# Altium PCB Test.PcbDoc (part 2 of 9)
Units mm, origin at the board's own origin, x right, y up, seen from the top; angles counter-clockwise.
Board outline 152.4 x 101.6 mm, 2 copper layers (Top Layer, Bottom Layer); 1 components, 0 nets, 1713 pads, 1 vias.
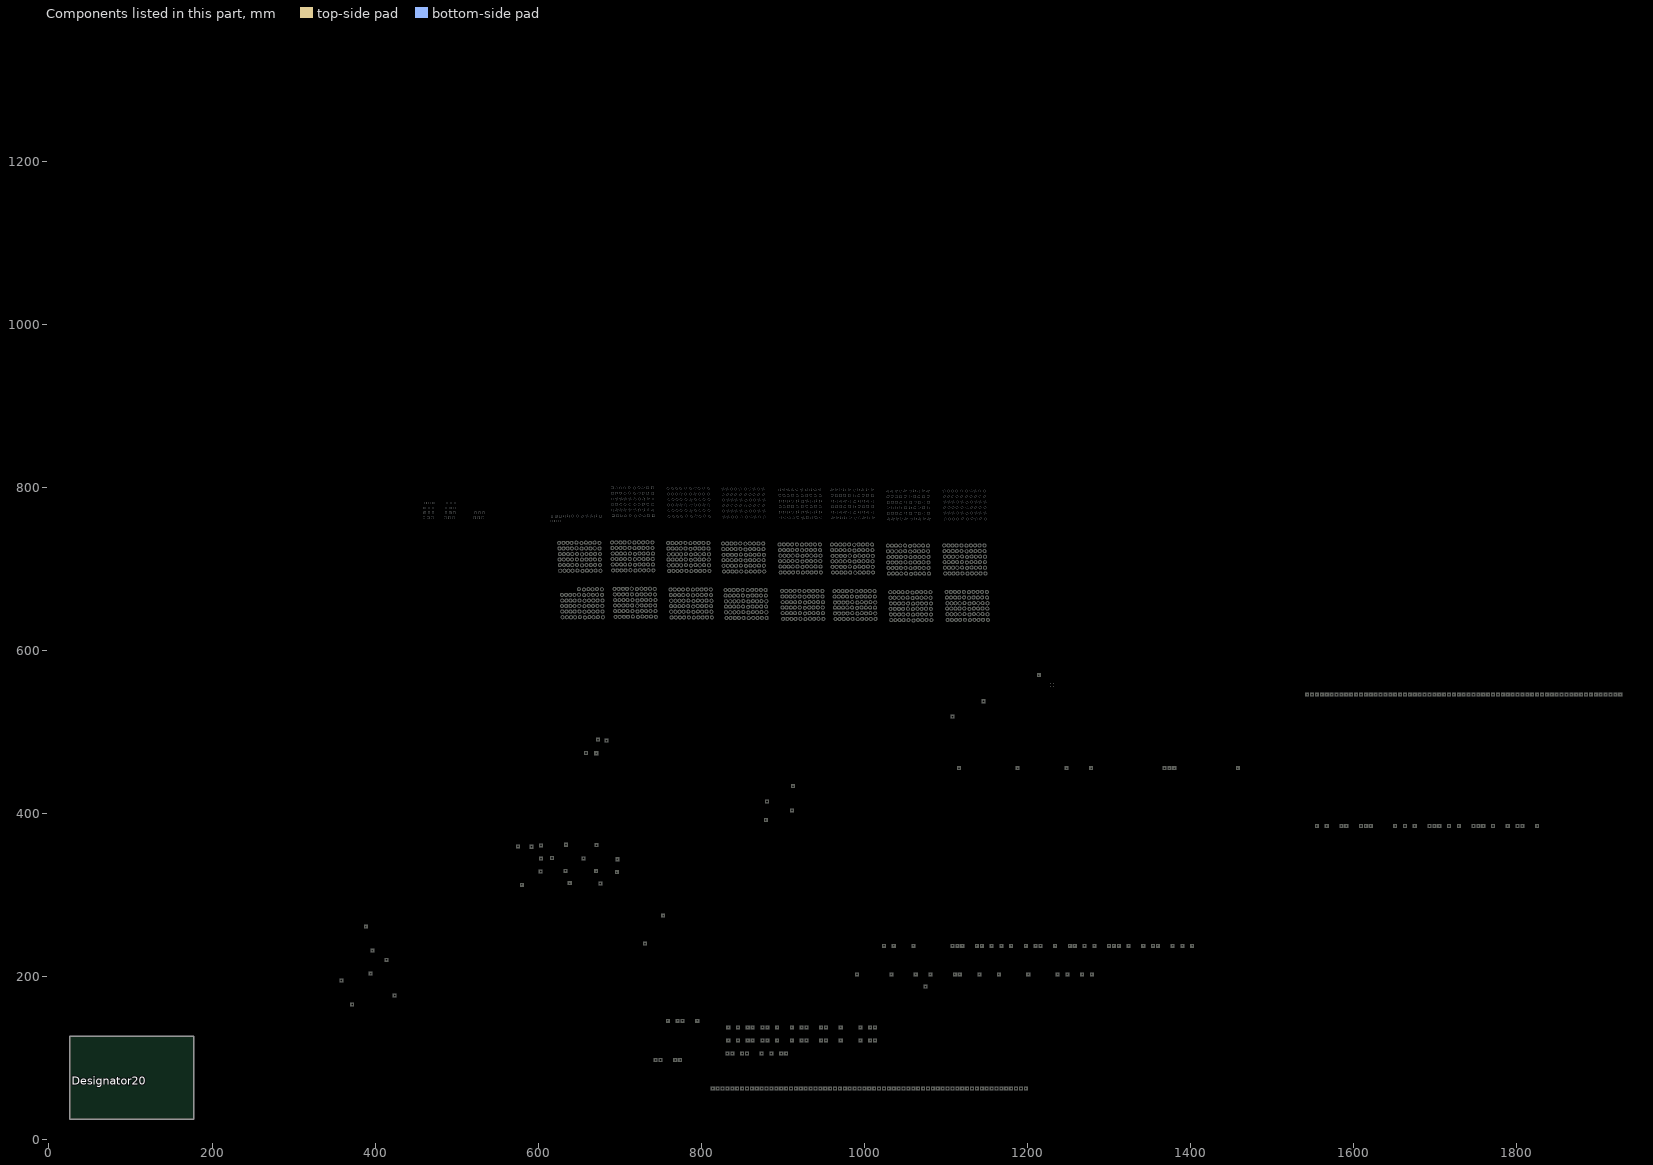
[diagram p2: the components of this part, seen from the top]

## Via types
v1: diameter 0.9, hole 0.4, Top Layer to Bottom Layer, 1 vias

## Nets (pads, with @x,y where several pads share a name; then routed paths per layer and width w, separated by ;. In a path a pad name is that pad's centre, name@x,y a point inside that pad or via, vN(x,y) a via of type N, cw(c..) or ccw(c..) an arc to the next point about the centre after c; other vN are vias at no path point) (continued)
copper on no net: (continued)
  Top Layer w0.2: 82.296,66.421 85.979,66.421 ; 83.185,69.088 88.265,69.088 ; 105.189,93.98 115.189,93.98 ; 115.189,83.98 115.189,93.98 ; 115.189,103.98 115.189,93.98 ; 125.189,93.98 115.189,93.98 ; 147.86,191.643 149.86,191.643 ; 149.86,189.643 149.86,191.643 ; 149.86,193.643 149.86,191.643 ; 151.86,191.643 149.86,191.643 ; 153.829,156.591 155.829,156.591 ; 155.829,154.591 155.829,156.591 ; 155.829,158.591 155.829,156.591 ; 155.861,175.133 157.861,175.133 ; 157.829,156.591 155.829,156.591 ; 157.861,173.133 157.861,175.133 ; 157.861,177.133 157.861,175.133 ; 159.861,175.133 157.861,175.133 ; 167.545,153.162 169.545,153.162 ; 168.688,186.182 170.688,186.182 ; 169.545,151.162 169.545,153.162 ; 169.545,155.162 169.545,153.162 ; 170.688,184.182 170.688,186.182 ; 170.688,188.182 170.688,186.182 ; 171.101,173.101 173.101,173.101 ; 171.545,153.162 169.545,153.162 ; 172.688,186.182 170.688,186.182 ; 173.101,171.101 173.101,173.101 ; 173.101,175.101 173.101,173.101 ; 175.101,173.101 173.101,173.101 ; 181.134,182.118 183.134,182.118 ; 181.388,144.653 183.388,144.653 ; 181.515,164.211 183.515,164.211 ; 183.134,180.118 183.134,182.118 ; 183.134,184.118 183.134,182.118 ; 183.388,142.653 183.388,144.653 ; 183.388,146.653 183.388,144.653 ; 183.515,162.211 183.515,164.211 ; 183.515,166.211 183.515,164.211 ; 185.134,182.118 183.134,182.118 ; 185.388,144.653 183.388,144.653 ; 185.515,164.211 183.515,164.211 ; 189.136,78.613 199.136,78.613 ; 191.548,160.655 193.548,160.655 ; 193.326,144.018 195.326,144.018 ; 193.548,158.655 193.548,160.655 ; 193.548,162.655 193.548,160.655 ; 194.342,175.895 196.342,175.895 ; 195.326,142.018 195.326,144.018 ; 195.326,146.018 195.326,144.018 ; 195.548,160.655 193.548,160.655 ; 196.342,173.895 196.342,175.895 ; 196.342,177.895 196.342,175.895 ; 197.326,144.018 195.326,144.018 ; 198.342,175.895 196.342,175.895 ; 199.136,68.613 199.136,78.613 ; 199.136,88.613 199.136,78.613 ; 201.962,156.464 203.962,156.464 ; 203.867,144.145 205.867,144.145 ; 203.867,172.593 205.867,172.593 ; 203.962,154.464 203.962,156.464 ; 203.962,158.464 203.962,156.464 ; 205.867,142.145 205.867,144.145 ; 205.867,146.145 205.867,144.145 ; 205.867,170.593 205.867,172.593 ; 205.867,174.593 205.867,172.593 ; 205.962,156.464 203.962,156.464 ; 207.867,144.145 205.867,144.145 ; 207.867,172.593 205.867,172.593 ; 209.136,78.613 199.136,78.613 ; 229.522,89.789 239.522,89.789 ; 230.665,58.801 198.12,59.182 ; 239.522,79.789 239.522,89.789 ; 239.522,99.789 239.522,89.789 ; 240.665,48.801 198.12,59.182 ; 240.665,68.801 198.12,59.182 ; 249.522,89.789 239.522,89.789 ; 250.665,58.801 198.12,59.182 ; 259.24,116.332 270.891,76.581 ; 269.24,106.332 270.891,76.581 ; 269.24,126.332 270.891,76.581 ; 276.385,63.754 286.385,63.754 ; 279.24,116.332 270.891,76.581 ; 280.575,230.124 282.575,230.124 ; 282.575,228.124 282.575,230.124 ; 282.575,232.124 282.575,230.124 ; 284.575,230.124 282.575,230.124 ; 286.385,53.754 286.385,63.754 ; 286.385,73.754 286.385,63.754 ; 296.385,63.754 286.385,63.754 ; 296.958,192.659 298.958,192.659 ; 298.958,190.659 298.958,192.659 ; 298.958,194.659 298.958,192.659 ; 300.958,192.659 298.958,192.659 ; 324.771,178.689 326.771,178.689 ; 326.771,176.689 326.771,178.689 ; 326.771,180.689 326.771,178.689 ; 328.771,178.689 326.771,178.689 ; 336.328,228.092 338.328,228.092 ; 338.328,226.092 338.328,228.092 ; 338.328,230.092 338.328,228.092 ; 339.884,199.009 341.884,199.009 ; 340.328,228.092 338.328,228.092 ; 341.884,197.009 341.884,199.009 ; 341.884,201.009 341.884,199.009 ; 343.884,199.009 341.884,199.009 ; 379.254,185.547 381.254,185.547 ; 381.254,183.547 381.254,185.547 ; 381.254,187.547 381.254,185.547 ; 383.254,185.547 381.254,185.547 ; 395.256,162.052 397.256,162.052 ; 397.256,160.052 397.256,162.052 ; 397.256,164.052 397.256,162.052 ; 399.256,162.052 397.256,162.052 ; 422.688,194.183 424.688,194.183 ; 424.688,192.183 424.688,194.183 ; 424.688,196.183 424.688,194.183 ; 426.688,194.183 424.688,194.183 ; 572.675,327.914 574.675,327.914 ; 573.183,343.662 575.183,343.662 ; 574.675,325.914 574.675,327.914 ; 574.675,329.914 574.675,327.914 ; 575.183,341.662 575.183,343.662 ; 575.183,345.662 575.183,343.662 ; 576.675,327.914 574.675,327.914 ; 577.183,343.662 575.183,343.662 ; 589.312,327.533 591.312,327.533 ; 589.82,343.281 591.82,343.281 ; 591.312,325.533 591.312,327.533 ; 591.312,329.533 591.312,327.533 ; 591.82,341.281 591.82,343.281 ; 591.82,345.281 591.82,343.281 ; 593.312,327.533 591.312,327.533 ; 593.82,343.281 591.82,343.281 ; 594.519,312.42 596.519,312.42 ; 596.519,310.42 596.519,312.42 ; 596.519,314.42 596.519,312.42 ; 598.519,312.42 596.519,312.42 ; 606.076,314.071 608.076,314.071 ; 608.076,312.071 608.076,314.071 ; 608.076,316.071 608.076,314.071 ; 610.076,314.071 608.076,314.071 ; 614.458,329.946 616.458,329.946 ; 614.966,361.95 616.966,361.95 ; 616.458,327.946 616.458,329.946 ; 616.458,331.946 616.458,329.946 ; 616.966,359.95 616.966,361.95 ; 616.966,363.95 616.966,361.95 ; 618.458,329.946 616.458,329.946 ; 618.966,361.95 616.966,361.95 ; 619.665,314.833 621.665,314.833 ; 621.665,312.833 621.665,314.833 ; 621.665,316.833 621.665,314.833 ; 623.665,314.833 621.665,314.833 ; 631.984,345.694 633.984,345.694 ; 633.984,343.694 633.984,345.694 ; 633.984,347.694 633.984,345.694 ; 635.984,345.694 633.984,345.694 ; 641.636,475.361 643.636,475.361 ; 643.636,473.361 643.636,475.361 ; 643.636,477.361 643.636,475.361 ; 643.795,491.998 645.795,491.998 ; 645.636,475.361 643.636,475.361 ; 645.795,489.998 645.795,491.998 ; 645.795,493.998 645.795,491.998 ; 647.795,491.998 645.795,491.998 ; 653.066,329.565 655.066,329.565 ; 653.574,361.569 655.574,361.569 ; 655.066,327.565 655.066,329.565 ; 655.066,331.565 655.066,329.565 ; 655.574,359.569 655.574,361.569 ; 655.574,363.569 655.574,361.569 ; 657.066,329.565 655.066,329.565 ; 657.574,361.569 655.574,361.569 ; 658.273,314.452 660.273,314.452 ; 658.781,491.109 660.781,491.109 ; 660.273,312.452 660.273,314.452 ; 660.273,316.452 660.273,314.452 ; 660.781,489.109 660.781,491.109 ; 660.781,493.109 660.781,491.109 ; 662.273,314.452 660.273,314.452 ; 662.781,491.109 660.781,491.109 ; 665.893,405.13 667.893,405.13 ; 667.893,403.13 667.893,405.13 ; 667.893,407.13 667.893,405.13 ; 669.449,345.313 671.449,345.313 ; 669.893,405.13 667.893,405.13 ; 671.449,343.313 671.449,345.313 ; 671.449,347.313 671.449,345.313 ; 673.449,345.313 671.449,345.313 ; 679.609,472.948 681.609,472.948 ; 681.609,470.948 681.609,472.948 ; 681.609,474.948 681.609,472.948 ; 683.609,472.948 681.609,472.948 ; 684.435,402.717 686.435,402.717 ; 686.435,400.717 686.435,402.717 ; 686.435,404.717 686.435,402.717 ; 688.435,402.717 686.435,402.717 ; 694.341,404.495 696.341,404.495 ; 694.976,360.426 696.976,360.426 ; 696.341,402.495 696.341,404.495 ; 696.341,406.495 696.341,404.495 ; 696.5,421.132 698.5,421.132 ; 696.976,358.426 696.976,360.426 ; 696.976,362.426 696.976,360.426 ; 698.341,404.495 696.341,404.495 ; 698.5,419.132 698.5,421.132 ; 698.5,423.132 698.5,421.132 ; 698.532,243.586 700.532,243.586 ; 698.976,360.426 696.976,360.426 ; 699.04,275.59 701.04,275.59 ; 699.675,313.309 701.675,313.309 ; 700.5,421.132 698.5,421.132 ; 700.532,241.586 700.532,243.586 ; 700.532,245.586 700.532,243.586 ; 701.04,273.59 701.04,275.59 ; 701.04,277.59 701.04,275.59 ; 701.675,311.309 701.675,313.309 ; 701.675,315.309 701.675,313.309 ; 702.532,243.586 700.532,243.586 ; 703.04,275.59 701.04,275.59 ; 703.675,313.309 701.675,313.309 ; 703.739,228.473 705.739,228.473 ; 705.739,226.473 705.739,228.473 ; 705.739,230.473 705.739,228.473 ; 707.168,403.86 709.168,403.86 ; 707.739,228.473 705.739,228.473 ; 709.168,401.86 709.168,403.86 ; 709.168,405.86 709.168,403.86 ; 711.168,403.86 709.168,403.86 ; 729.393,256.413 731.393,256.413 ; 731.393,254.413 731.393,256.413 ; 731.393,258.413 731.393,256.413 ; 733.393,256.413 731.393,256.413 ; 734.092,225.552 736.092,225.552 ; 736.092,223.552 736.092,225.552 ; 736.092,227.552 736.092,225.552 ; 738.092,225.552 736.092,225.552 ; 751,146 753,146 ; 751,184 753,184 ; 753,144 753,146 ; 753,148 753,146 ; 753,182 753,184 ; 753,186 753,184 ; 755,146 753,146 ; 755,184 753,184 ; 757,184 759,184 ; 759,182 759,184 ; 759,186 759,184 ; 761,184 759,184 ; 763,146 765,146 ; 763,184 765,184 ; 765,144 765,146 ; 765,148 765,146 ; 765,182 765,184 ; 765,186 765,184 ; 767,146 765,146 ; 767,184 765,184 ; 769,184 771,184 ; 771,182 771,184 ; 771,186 771,184 ; 773,184 771,184 ; 775,184 777,184 ; 777,182 777,184 ; 777,186 777,184 ; 779,184 777,184 ; 781,146 783,146 ; 781,184 783,184 ; 783,144 783,146 ; 783,148 783,146 ; 783,182 783,184 ; 783,186 783,184 ; 785,146 783,146 ; 785,184 783,184 ; 787,146 789,146 ; 787,184 789,184 ; 789,144 789,146 ; 789,148 789,146 ; 789,182 789,184 ; 789,186 789,184 ; 791,146 789,146 ; 791,184 789,184 ; 793,184 795,184 ; 795,182 795,184 ; 795,186 795,184 ; 797,184 795,184 ; 798.354,403.733 800.354,403.733 ; 799,146 801,146 ; 799,184 801,184 ; 800.354,401.733 800.354,403.733 ; 800.354,405.733 800.354,403.733 ; 801,144 801,146 ; 801,148 801,146 ; 801,182 801,184 ; 801,186 801,184 ; 802.354,403.733 800.354,403.733 ; 803,146 801,146 ; 803,184 801,184 ; 818,106 820,106 ; 819,122 821,122 ; 819,138 821,138 ; 820,104 820,106 ; 820,108 820,106 ; 821,120 821,122 ; 821,124 821,122 ; 821,136 821,138 ; 821,140 821,138 ; 822,106 820,106 ; 823,122 821,122 ; 823,138 821,138 ; 824,106 826,106 ; 825,122 827,122 ; 825,138 827,138 ; 826,104 826,106 ; 826,108 826,106 ; 827,120 827,122 ; 827,124 827,122 ; 827,136 827,138 ; 827,140 827,138 ; 828,106 826,106 ; 829,122 827,122 ; 829,138 827,138 ; 837,122 839,122 ; 837,138 839,138 ; 839,120 839,122 ; 839,124 839,122 ; 839,136 839,138 ; 839,140 839,138 ; 839.629,394.462 841.629,394.462 ; 841,122 839,122 ; 841,138 839,138 ; 841.629,392.462 841.629,394.462 ; 841.629,396.462 841.629,394.462 ; 842,106 844,106 ; 843.058,433.832 845.058,433.832 ; 843.629,394.462 841.629,394.462 ; 844,104 844,106 ; 844,108 844,106 ; 845.058,431.832 845.058,433.832 ; 845.058,435.832 845.058,433.832 ; 846,106 844,106 ; 847.058,433.832 845.058,433.832 ; 849,122 851,122 ; 849,138 851,138 ; 851,120 851,122 ; 851,124 851,122 ; 851,136 851,138 ; 851,140 851,138 ; 853,122 851,122 ; 853,138 851,138 ; 860,106 862,106 ; 862,104 862,106 ; 862,108 862,106 ; 864,106 862,106 ; 866,106 868,106 ; 867,122 869,122 ; 867,138 869,138 ; 868,104 868,106 ; 868,108 868,106 ; 869,120 869,122 ; 869,124 869,122 ; 869,136 869,138 ; 869,140 869,138 ; 870,106 868,106 ; 871,122 869,122 ; 871,138 869,138 ; 876.586,235.204 878.586,235.204 ; 878,106 880,106 ; 878.491,234.315 880.491,234.315 ; 878.586,233.204 878.586,235.204 ; 878.586,237.204 878.586,235.204 ; 878.745,251.841 880.745,251.841 ; 879.38,401.955 881.38,401.955 ; 880,104 880,106 ; 880,108 880,106 ; 880.491,232.315 880.491,234.315 ; 880.491,236.315 880.491,234.315 ; 880.586,235.204 878.586,235.204 ; 880.65,250.952 882.65,250.952 ; 880.65,431.673 882.65,431.673 ; 880.745,249.841 880.745,251.841 ; 880.745,253.841 880.745,251.841 ; 881.38,399.955 881.38,401.955 ; 881.38,403.955 881.38,401.955 ; 882,106 880,106 ; 882.491,234.315 880.491,234.315 ; 882.65,248.952 882.65,250.952 ; 882.65,252.952 882.65,250.952 ; 882.65,429.673 882.65,431.673 ; 882.65,433.673 882.65,431.673 ; 882.745,251.841 880.745,251.841 ; 883.38,401.955 881.38,401.955 ; 884.65,250.952 882.65,250.952 ; 884.65,431.673 882.65,431.673 ; 885,122 887,122 ; 885,138 887,138 ; 887,120 887,122 ; 887,124 887,122 ; 887,136 887,138 ; 887,140 887,138 ; 889,122 887,122 ; 889,138 887,138 ; 890,106 892,106 ; 892,104 892,106 ; 892,108 892,106 ; 894,106 892,106 ; 897,122 899,122 ; 897,138 899,138 ; 899,120 899,122 ; 899,124 899,122 ; 899,136 899,138 ; 899,140 899,138 ; 899.7,234.315 901.7,234.315 ; 901,122 899,122 ; 901,138 899,138 ; 901.7,232.315 901.7,234.315 ; 901.7,236.315 901.7,234.315 ; 901.859,250.952 903.859,250.952 ; 903,122 905,122 ; 903,138 905,138 ; 903.7,234.315 901.7,234.315 ; 903.859,248.952 903.859,250.952 ; 903.859,252.952 903.859,250.952 ; 905,120 905,122 ; 905,124 905,122 ; 905,136 905,138 ; 905,140 905,138 ; 905.859,250.952 903.859,250.952 ; 907,122 905,122 ; 907,138 905,138 ; 907.066,394.462 909.066,394.462 ; 908,106 910,106 ; 908.336,417.195 910.336,417.195 ; 909.066,392.462 909.066,394.462 ; 909.066,396.462 909.066,394.462 ; 910,104 910,106 ; 910,108 910,106 ; 910.336,415.195 910.336,417.195 ; 910.336,419.195 910.336,417.195 ; 911.066,394.462 909.066,394.462 ; 912,106 910,106 ; 912.336,417.195 910.336,417.195 ; 914,106 916,106 ; 915,122 917,122 ; 915,138 917,138 ; 916,104 916,106 ; 916,108 916,106 ; 917,120 917,122 ; 917,124 917,122 ; 917,136 917,138 ; 917,140 917,138 ; 917.48,233.807 919.48,233.807 ; 918,106 916,106 ; 919,122 917,122 ; 919,138 917,138 ; 919.48,231.807 919.48,233.807 ; 919.48,235.807 919.48,233.807 ; 919.639,250.444 921.639,250.444 ; 921.48,233.807 919.48,233.807 ; 921.639,248.444 921.639,250.444 ; 921.639,252.444 921.639,250.444 ; 923.639,250.444 921.639,250.444 ; 931.958,233.807 933.958,233.807 ; 933,122 935,122 ; 933,138 935,138 ; 933.958,231.807 933.958,233.807 ; 933.958,235.807 933.958,233.807 ; 934.117,250.444 936.117,250.444 ; 935,120 935,122 ; 935,124 935,122 ; 935,136 935,138 ; 935,140 935,138 ; 935.958,233.807 933.958,233.807 ; 936.117,248.444 936.117,250.444 ; 936.117,252.444 936.117,250.444 ; 937,122 935,122 ; 937,138 935,138 ; 938.117,250.444 936.117,250.444 ; 939,122 941,122 ; 939,138 941,138 ; 941,120 941,122 ; 941,124 941,122 ; 941,136 941,138 ; 941,140 941,138 ; 943,122 941,122 ; 943,138 941,138 ; 947,203 949,203 ; 949,201 949,203 ; 949,205 949,203 ; 951,203 949,203 ; 953,203 955,203 ; 955,201 955,203 ; 955,205 955,203 ; 957,122 959,122 ; 957,138 959,138 ; 957,203 955,203 ; 959,120 959,122 ; 959,124 959,122 ; 959,136 959,138 ; 959,140 959,138 ; 959,188 961,188 ; 959,203 961,203 ; 961,122 959,122 ; 961,138 959,138 ; 961,186 961,188 ; 961,190 961,188 ; 961,201 961,203 ; 961,205 961,203 ; 963,122 965,122 ; 963,138 965,138 ; 963,188 961,188 ; 963,203 961,203 ; 965,120 965,122 ; 965,124 965,122 ; 965,136 965,138 ; 965,140 965,138 ; 965,188 967,188 ; 965,203 967,203 ; 966.121,233.299 968.121,233.299 ; 967,122 965,122 ; 967,138 965,138 ; 967,186 967,188 ; 967,190 967,188 ; 967,201 967,203 ; 967,205 967,203 ; 968.121,231.299 968.121,233.299 ; 968.121,235.299 968.121,233.299 ; 968.28,249.936 970.28,249.936 ; 969,188 967,188 ; 969,203 967,203 ; 970.121,233.299 968.121,233.299 ; 970.28,247.936 970.28,249.936 ; 970.28,251.936 970.28,249.936 ; 971,188 973,188 ; 971,203 973,203 ; 972.28,249.936 970.28,249.936 ; 973,186 973,188 ; 973,190 973,188 ; 973,201 973,203 ; 973,205 973,203 ; 975,122 977,122 ; 975,138 977,138 ; 975,188 973,188 ; 975,203 973,203 ; 977,120 977,122 ; 977,124 977,122 ; 977,136 977,138 ; 977,140 977,138 ; 977,203 979,203 ; 979,122 977,122 ; 979,138 977,138 ; 979,201 979,203 ; 979,205 979,203 ; 981,122 983,122 ; 981,138 983,138 ; 981,203 979,203 ; 983,120 983,122 ; 983,124 983,122 ; 983,136 983,138 ; 983,140 983,138 ; 983,203 985,203 ; 985,122 983,122 ; 985,138 983,138 ; 985,201 985,203 ; 985,205 985,203 ; 987,122 989,122 ; 987,138 989,138 ; 987,203 985,203 ; 989,120 989,122 ; 989,124 989,122 ; 989,136 989,138 ; 989,140 989,138 ; 991,122 989,122 ; 991,138 989,138 ; 995,203 997,203 ; 997,201 997,203 ; 997,205 997,203 ; 999,122 1001,122 ; 999,138 1001,138 ; 999,203 997,203 ; 1001,120 1001,122 ; 1001,124 1001,122 ; 1001,136 1001,138 ; 1001,140 1001,138 ; 1001,203 1003,203 ; 1003,122 1001,122 ; 1003,138 1001,138 ; 1003,201 1003,203 ; 1003,205 1003,203 ; 1005,203 1003,203 ; 1006,351 1008,351 ; 1007,203 1009,203 ; 1008,349 1008,351 ; 1008,353 1008,351 ; 1009,201 1009,203 ; 1009,205 1009,203 ; 1010,351 1008,351 ; 1011,203 1009,203 ; 1012,351 1014,351 ; 1013,203 1015,203 ; 1014,349 1014,351 ; 1014,353 1014,351 ; 1015,201 1015,203 ; 1015,205 1015,203 ; 1016,238 1018,238 ; 1016,351 1014,351 ; 1017,203 1015,203 ; 1018,236 1018,238 ; 1018,240 1018,238 ; 1018,351 1020,351 ; 1019,203 1021,203 ; 1020,238 1018,238 ; 1020,349 1020,351 ; 1020,353 1020,351 ; 1021,201 1021,203 ; 1021,205 1021,203 ; 1022,351 1020,351 ; 1023,203 1021,203 ; 1024,351 1026,351 ; 1025,203 1027,203 ; 1026,349 1026,351 ; 1026,353 1026,351 ; 1027,201 1027,203 ; 1027,205 1027,203 ; 1028,238 1030,238 ; 1028,351 1026,351 ; 1029,203 1027,203 ; 1030,236 1030,238 ; 1030,240 1030,238 ; 1030,351 1032,351 ; 1032,238 1030,238 ; 1032,349 1032,351 ; 1032,353 1032,351 ; 1034,351 1032,351 ; 1036,351 1038,351 ; 1037,203 1039,203 ; 1038,349 1038,351 ; 1038,353 1038,351 ; 1039,201 1039,203 ; 1039,205 1039,203 ; 1040,238 1042,238 ; 1040,351 1038,351 ; 1041,203 1039,203 ; 1042,236 1042,238 ; 1042,240 1042,238 ; 1042,351 1044,351 ; 1043,203 1045,203 ; 1044,238 1042,238 ; 1044,349 1044,351 ; 1044,353 1044,351 ; 1045,201 1045,203 ; 1045,205 1045,203 ; 1046,238 1048,238 ; 1046,351 1044,351 ; 1047,203 1045,203 ; 1047,300 1049,300 ; 1048,236 1048,238 ; 1048,240 1048,238 ; 1048,351 1050,351 ; 1049,203 1051,203 ; 1049,298 1049,300 ; 1049,302 1049,300 ; 1050,238 1048,238 ; 1050,349 1050,351 ; 1050,353 1050,351 ; 1051,201 1051,203 ; 1051,205 1051,203 ; 1051,300 1049,300 ; 1052,238 1054,238 ; 1052,351 1050,351 ; 1053,203 1051,203 ; 1053,300 1055,300 ; 1054,236 1054,238 ; 1054,240 1054,238 ; 1054,351 1056,351 ; 1055,203 1057,203 ; 1055,298 1055,300 ; 1055,302 1055,300 ; 1056,238 1054,238 ; 1056,349 1056,351 ; 1056,353 1056,351 ; 1057,201 1057,203 ; 1057,205 1057,203 ; 1057,300 1055,300 ; 1058,351 1056,351 ; 1059,203 1057,203 ; 1059,300 1061,300 ; 1060,351 1062,351 ; 1061,298 1061,300 ; 1061,302 1061,300 ; 1062,349 1062,351 ; 1062,353 1062,351 ; 1063,300 1061,300 ; 1064,238 1066,238 ; 1064,351 1062,351 ; 1065,300 1067,300 ; 1066,236 1066,238 ; 1066,240 1066,238 ; 1066,351 1068,351 ; 1067,203 1069,203 ; 1067,298 1067,300 ; 1067,302 1067,300 ; 1068,238 1066,238 ; 1068,349 1068,351 ; 1068,353 1068,351 ; 1069,201 1069,203 ; 1069,205 1069,203 ; 1069,300 1067,300 ; 1070,351 1068,351 ; 1071,203 1069,203 ; 1071,300 1073,300 ; 1072,351 1074,351 ; 1073,203 1075,203 ; 1073,298 1073,300 ; 1073,302 1073,300 ; 1074,349 1074,351 ; 1074,353 1074,351 ; 1075,201 1075,203 ; 1075,205 1075,203 ; 1075,300 1073,300 ; 1076,351 1074,351 ; 1077,300 1079,300 ; 1077,203 1075,203 ; 1078,351 1080,351 ; 1079,298 1079,300 ; 1079,302 1079,300 ; 1080,349 1080,351 ; 1080,353 1080,351 ; 1081,300 1079,300 ; 1082,351 1080,351 ; 1083,300 1085,300 ; 1084,351 1086,351 ; 1084,537 1086,537 ; 1085,203 1087,203 ; 1085,298 1085,300 ; 1085,302 1085,300 ; 1085,519 1087,519 ; 1086,349 1086,351 ; 1086,353 1086,351 ; 1086,535 1086,537 ; 1086,539 1086,537 ; 1087,201 1087,203 ; 1087,205 1087,203 ; 1087,300 1085,300 ; 1087,517 1087,519 ; 1087,521 1087,519 ; 1088,238 1090,238 ; 1088,351 1086,351 ; 1088,537 1086,537 ; 1089,203 1087,203 ; 1089,300 1091,300 ; 1089,519 1087,519 ; 1090,236 1090,238 ; 1090,240 1090,238 ; 1090,351 1092,351 ; 1091,203 1093,203 ; 1091,298 1091,300 ; 1091,302 1091,300 ; 1092,238 1090,238 ; 1092,349 1092,351 ; 1092,353 1092,351 ; 1093,201 1093,203 ; 1093,205 1093,203 ; 1093,300 1091,300 ; 1094,238 1096,238 ; 1094,351 1092,351 ; 1095,203 1093,203 ; 1095,300 1097,300 ; 1095,537 1097,537 ; 1096,236 1096,238 ; 1096,240 1096,238 ; 1096,351 1098,351 ; 1096,519 1098,519 ; 1097,203 1099,203 ; 1097,298 1097,300 ; 1097,302 1097,300 ; 1097,535 1097,537 ; 1097,539 1097,537 ; 1098,238 1096,238 ; 1098,349 1098,351 ; 1098,353 1098,351 ; 1098,517 1098,519 ; 1098,521 1098,519 ; 1099,201 1099,203 ; 1099,205 1099,203 ; 1099,300 1097,300 ; 1099,537 1097,537 ; 1100,238 1102,238 ; 1100,351 1098,351 ; 1100,519 1098,519 ; 1101,203 1099,203 ; 1101,300 1103,300 ; 1102,236 1102,238 ; 1102,240 1102,238 ; 1102,351 1104,351 ; 1103,203 1105,203 ; 1103,298 1103,300 ; 1103,302 1103,300 ; 1104,238 1102,238 ; 1104,349 1104,351 ; 1104,353 1104,351 ; 1105,201 1105,203 ; 1105,205 1105,203 ; 1105,300 1103,300 ; 1106,351 1104,351 ; 1107,203 1105,203 ; 1107,300 1109,300 ; 1108,351 1110,351 ; 1109,298 1109,300 ; 1109,302 1109,300 ; 1110,349 1110,351 ; 1110,353 1110,351 ; 1111,300 1109,300 ; 1112,351 1110,351 ; 1113,300 1115,300 ; 1114,351 1116,351 ; 1115,298 1115,300 ; 1115,302 1115,300 ; 1116,349 1116,351 ; 1116,353 1116,351 ; 1117,300 1115,300 ; 1118,351 1116,351 ; 1119,300 1121,300 ; 1119,550 1121,550 ; 1120,351 1122,351 ; 1120,456 1122,456 ; 1121,203 1123,203 ; 1121,298 1121,300 ; 1121,302 1121,300 ; 1121,548 1121,550 ; 1121,552 1121,550 ; 1122,349 1122,351 ; 1122,353 1122,351 ; 1122,454 1122,456 ; 1122,458 1122,456 ; 1123,201 1123,203 ; 1123,205 1123,203 ; 1123,300 1121,300 ; 1123,550 1121,550 ; 1124,238 1126,238 ; 1124,351 1122,351 ; 1124,456 1122,456 ; 1125,203 1123,203 ; 1125,300 1127,300 ; 1126,236 1126,238 ; 1126,240 1126,238 ; 1126,351 1128,351 ; 1126,456 1128,456 ; 1126,550 1128,550 ; 1127,203 1129,203 ; 1127,298 1127,300 ; 1127,302 1127,300 ; 1127,547 1129,547 ; 1127,549 1129,549 1129,551 1127,551 ; 1128,238 1126,238 ; 1128,349 1128,351 ; 1128,353 1128,351 ; 1128,454 1128,456 ; 1128,458 1128,456 ; 1128,548 1128,550 ; 1128,552 1128,550 ; 1129,201 1129,203 ; 1129,205 1129,203 ; 1129,300 1127,300 ; 1130,238 1132,238 ; 1130,351 1128,351 ; 1130,456 1128,456 ; 1130,550 1128,550 ; 1131,203 1129,203 ; 1131,300 1133,300 ; 1132,236 1132,238 ; 1132,240 1132,238 ; 1132,351 1134,351 ; 1132,456 1134,456 ; 1133,203 1135,203 ; 1133,298 1133,300 ; 1133,302 1133,300 ; 1133,539 1135,539 ; 1133,550 1135,550 ; 1134,238 1132,238 ; 1134,349 1134,351 ; 1134,353 1134,351 ; 1134,454 1134,456 ; 1134,458 1134,456 ; 1135,201 1135,203 ; 1135,205 1135,203 ; 1135,300 1133,300 ; 1135,537 1135,539 ; 1135,541 1135,539 ; 1135,548 1135,550 ; 1135,552 1135,550 ; 1136,351 1134,351 ; 1136,456 1134,456 ; 1137,203 1135,203 ; 1137,300 1139,300 ; 1137,539 1135,539 ; 1137,550 1135,550 ; 1138,351 1140,351 ; 1138,456 1140,456 ; 1139,298 1139,300 ; 1139,302 1139,300 ; 1140,349 1140,351 ; 1140,353 1140,351 ; 1140,454 1140,456 ; 1140,458 1140,456 ; 1141,300 1139,300 ; 1142,351 1140,351 ; 1142,456 1140,456 ; 1143,300 1145,300 ; 1144,351 1146,351 ; 1144,456 1146,456 ; 1145,203 1147,203 ; 1145,298 1145,300 ; 1145,302 1145,300 ; 1146,349 1146,351 ; 1146,353 1146,351 ; 1146,454 1146,456 ; 1146,458 1146,456 ; 1147,201 1147,203 ; 1147,205 1147,203 ; 1147,300 1145,300 ; 1148,238 1150,238 ; 1148,351 1146,351 ; 1148,456 1146,456 ; 1149,203 1147,203 ; 1149,300 1151,300 ; 1150,236 1150,238 ; 1150,240 1150,238 ; 1150,351 1152,351 ; 1150,456 1152,456 ; 1151,203 1153,203 ; 1151,298 1151,300 ; 1151,302 1151,300 ; 1152,238 1150,238 ; 1152,349 1152,351 ; 1152,353 1152,351 ; 1152,454 1152,456 ; 1152,458 1152,456 ; 1153,201 1153,203 ; 1153,205 1153,203 ; 1153,300 1151,300 ; 1154,351 1152,351 ; 1154,456 1152,456 ; 1155,203 1153,203 ; 1155,300 1157,300 ; 1156,351 1158,351 ; 1156,456 1158,456 ; 1157,203 1159,203 ; 1157,298 1157,300 ; 1157,302 1157,300 ; 1158,349 1158,351 ; 1158,353 1158,351 ; 1158,454 1158,456 ; 1158,458 1158,456 ; 1159,201 1159,203 ; 1159,205 1159,203 ; 1159,300 1157,300 ; 1160,238 1162,238 ; 1160,351 1158,351 ; 1160,456 1158,456 ; 1161,203 1159,203 ; 1161,300 1163,300 ; 1162,236 1162,238 ; 1162,240 1162,238 ; 1162,351 1164,351 ; 1162,456 1164,456 ; 1163,298 1163,300 ; 1163,302 1163,300 ; 1164,238 1162,238 ; 1164,349 1164,351 ; 1164,353 1164,351 ; 1164,454 1164,456 ; 1164,458 1164,456 ; 1165,300 1163,300 ; 1165,560 1167,560 ; 1166,351 1164,351 ; 1166,456 1164,456 ; 1167,300 1169,300 ; 1167,558 1167,560 ; 1167,562 1167,560 ; 1168,351 1170,351 ; 1168,456 1170,456 ; 1169,203 1171,203 ; 1169,298 1169,300 ; 1169,302 1169,300 ; 1169,560 1167,560 ; 1170,349 1170,351 ; 1170,353 1170,351 ; 1170,454 1170,456 ; 1170,458 1170,456 ; 1171,201 1171,203 ; 1171,205 1171,203 ; 1171,300 1169,300 ; 1172,238 1174,238 ; 1172,351 1170,351 ; 1172,456 1170,456 ; 1172,549 1174,549 ; 1172,560 1174,560 ; 1172.5,564.5 cw(c1172.5,565.5) 1172.5,566.5 ; 1173,203 1171,203 ; 1173,300 1175,300 ; 1174,236 1174,238 ; 1174,240 1174,238 ; 1174,351 1176,351 ; 1174,456 1176,456 ; 1174,558 1174,560 ; 1174,562 1174,560 ; 1175,203 1177,203 ; 1175,298 1175,300 ; 1175,302 1175,300 ; 1176,238 1174,238 ; 1176,349 1176,351 ; 1176,353 1176,351 ; 1176,454 1176,456 ; 1176,458 1176,456 ; 1176,560 1174,560 ; 1177,201 1177,203 ; 1177,205 1177,203 ; 1177,300 1175,300 ; 1178,351 1176,351 ; 1178,456 1176,456 ; 1179,203 1177,203 ; 1179,300 1181,300 ; 1179,560 1181,560 ; 1180,351 1182,351 ; 1180,456 1182,456 ; 1181,203 1183,203 ; 1181,298 1181,300 ; 1181,302 1181,300 ; 1181,558 1181,560 ; 1181,562 1181,560 ; 1182,349 1182,351 ; 1182,353 1182,351 ; 1182,454 1182,456 ; 1182,458 1182,456 ; 1183,201 1183,203 ; 1183,205 1183,203 ; 1183,300 1181,300 ; 1183,560 1181,560 ; 1184,238 1186,238 ; 1184,351 1182,351 ; 1184,456 1182,456 ; 1185,203 1183,203 ; 1185,300 1187,300 ; 1186,236 1186,238 ; 1186,240 1186,238 ; 1186,351 1188,351 ; 1187,203 1189,203 ; 1187,298 1187,300 ; 1187,302 1187,300 ; 1188,238 1186,238 ; 1188,349 1188,351 ; 1188,353 1188,351 ; 1189,201 1189,203 ; 1189,205 1189,203 ; 1189,300 1187,300 ; 1190,238 1192,238 ; 1190,351 1188,351 ; 1191,203 1189,203 ; 1191,300 1193,300 ; 1192,236 1192,238 ; 1192,240 1192,238 ; 1192,351 1194,351 ; 1192,456 1194,456 ; 1193,203 1195,203 ; 1193,298 1193,300 ; 1193,302 1193,300 ; 1193,548 1195,548 ; 1193,554 1195,554 ; 1193,561 1195,561 ; 1194,238 1192,238 ; 1194,349 1194,351 ; 1194,353 1194,351 ; 1194,454 1194,456 ; 1194,458 1194,456 ; 1195,201 1195,203 ; 1195,205 1195,203 ; 1195,300 1193,300 ; 1195,546 1195,548 ; 1195,550 1195,548 ; 1195,552 1195,554 ; 1195,556 1195,554 ; 1195,559 1195,561 ; 1195,563 1195,561 ; 1196,351 1194,351 ; 1196,456 1194,456 ; 1197,203 1195,203 ; 1197,300 1199,300 ; 1197,548 1195,548 ; 1197,554 1195,554 ; 1197,561 1195,561 ; 1198,351 1200,351 ; 1198,456 1200,456 ; 1199,298 1199,300 ; 1199,302 1199,300 ; 1200,349 1200,351 ; 1200,353 1200,351 ; 1200,454 1200,456 ; 1200,458 1200,456 ; 1200,548 1202,548 ; 1200,554 1202,554 ; 1200,561 1202,561 ; 1200.5,558.5 cw(c1200.5,559.5) 1200.5,560.5 ; 1200.5,559.5 1203.5,559.5 ; 1200.5,562.5 1203.5,562.5 ; 1201,300 1199,300 ; 1202,238 1204,238 ; 1202,351 1200,351 ; 1202,456 1200,456 ; 1202,546 1202,548 ; 1202,550 1202,548 ; 1202,552 1202,554 ; 1202,556 1202,554 ; 1202,559 1202,561 ; 1202,563 1202,561 ; 1203,300 1205,300 ; 1203.5,561.5 ccw(c1203.5,562.5) 1203.5,563.5 ; 1204,456 1206,456 ; 1204,548 1202,548 ; 1204,554 1202,554 ; 1204,561 1202,561 ; 1204,236 1204,238 ; 1204,240 1204,238 ; 1204,351 1206,351 ; 1205,203 1207,203 ; 1205,298 1205,300 ; 1205,302 1205,300 ; 1206,238 1204,238 ; 1206,349 1206,351 ; 1206,353 1206,351 ; 1206,454 1206,456 ; 1206,458 1206,456 ; 1207,201 1207,203 ; 1207,205 1207,203 ; 1207,300 1205,300 ; 1207,548 1209,548 ; 1207,554 1209,554 ; 1207,561 1209,561 ; 1208,351 1206,351 ; 1208,456 1206,456 ; 1209,203 1207,203 ; 1209,300 1211,300 ; 1209,546 1209,548 ; 1209,550 1209,548 ; 1209,552 1209,554 ; 1209,556 1209,554 ; 1209,559 1209,561 ; 1209,563 1209,561 ; 1210,351 1212,351 ; 1210,456 1212,456 ; 1211,203 1213,203 ; 1211,298 1211,300 ; 1211,302 1211,300 ; 1211,548 1209,548 ; 1211,554 1209,554 ; 1211,561 1209,561 ; 1212,349 1212,351 ; 1212,353 1212,351 ; 1212,454 1212,456 ; 1212,458 1212,456 ; 1212,576 1214,576 ; 1213,201 1213,203 ; 1213,205 1213,203 ; 1213,300 1211,300 ; 1214,351 1212,351 ; 1214,456 1212,456 ; 1214,574 1214,576 ; 1214,578 1214,576 ; 1215,203 1213,203 ; 1215,300 1217,300 ; 1216,351 1218,351 ; 1216,456 1218,456 ; 1216,576 1214,576 ; 1217,203 1219,203 ; 1217,298 1217,300 ; 1217,302 1217,300 ; 1218,349 1218,351 ; 1218,353 1218,351 ; 1218,454 1218,456 ; 1218,458 1218,456 ; 1218,547 1220,547 ; 1218,559 cw(c1218,558) 1219,558 ; 1219,201 1219,203 ; 1219,205 1219,203 ; 1219,300 1217,300 ; 1219,561 1221,561 ; 1219,576 1221,576 ; 1219.5,545.5 cw(c1219.5,546.5) 1219.5,547.5 ; 1220,238 1222,238 ; 1220,351 1218,351 ; 1220,456 1218,456 ; 1220,545 1220,547 ; 1220,549 1220,547 ; 1220,551 cw(c1220,552) 1220,553 ; 1221,203 1219,203 ; 1221,300 1223,300 ; 1221,555 1223,555 ; 1221,559 1221,561 ; 1221,563 1221,561 ; 1221,574 1221,576 ; 1221,578 1221,576 ; 1221.5,547.5 ccw(c1221.5,548.5) 1221.5,549.5 ; 1222,236 1222,238 ; 1222,240 1222,238 ; 1222,351 1224,351 ; 1222,456 1224,456 ; 1222,547 1220,547 ; 1223,203 1225,203 ; 1223,298 1223,300 ; 1223,302 1223,300 ; 1223,553 1223,555 ; 1223,557 1223,555 ; 1223,561 1221,561 ; 1223,576 1221,576 ; 1224,238 1222,238 ; 1224,349 1224,351 ; 1224,353 1224,351 ; 1224,454 1224,456 ; 1224,458 1224,456 ; 1224,545 1226,545 ; 1224,563 cw(c1224,564) 1225,564 ; 1224.5,542.5 cw(c1224.5,543.5) 1224.5,544.5 ; 1225,201 1225,203 ; 1225,205 1225,203 ; 1225,300 1223,300 ; 1225,555 1223,555 ; 1226,238 1228,238 ; 1226,351 1224,351 ; 1226,456 1224,456 ; 1226,543 1226,545 ; 1226,547 1226,545 ; 1226,557 ccw(c1226,558) 1226,559 ; 1226,576 1228,576 ; 1227,203 1225,203 ; 1227,300 1229,300 ; 1227.5,545.5 ccw(c1227.5,546.5) 1227.5,547.5 ; 1228,236 1228,238 ; 1228,240 1228,238 ; 1228,351 1230,351 ; 1228,456 1230,456 ; 1228,545 1226,545 ; 1228,574 1228,576 ; 1228,578 1228,576 ; 1229,203 1231,203 ; 1229,298 1229,300 ; 1229,302 1229,300 ; 1230,238 1228,238 ; 1230,349 1230,351 ; 1230,353 1230,351 ; 1230,454 1230,456 ; 1230,458 1230,456 ; 1230,548 1232,548 ; 1230,576 1228,576 ; 1231,201 1231,203 ; 1231,205 1231,203 ; 1231,300 1229,300 ; 1231.5,546.5 cw(c1231.5,547.5) 1231.5,548.5 ; 1232,351 1230,351 ; 1232,456 1230,456 ; 1232,546 1232,548 ; 1232,550 1232,548 ; 1232.5,546.5 ccw(c1232.5,547.5) 1232.5,548.5 ; 1233,203 1231,203 ; 1233,300 1235,300 ; 1234,351 1236,351 ; 1234,456 1236,456 ; 1234,548 1232,548 ; 1235,298 1235,300 ; 1235,302 1235,300 ; 1236,349 1236,351 ; 1236,353 1236,351 ; 1236,454 1236,456 ; 1236,458 1236,456 ; 1236,566 1241,566 ; 1237,300 1235,300 ; 1238,238 1240,238 ; 1238,351 1236,351 ; 1238,456 1236,456 ; 1239,300 1241,300 ; 1240,236 1240,238 ; 1240,240 1240,238 ; 1240,351 1242,351 ; 1240,456 1242,456 ; 1241,203 1243,203 ; 1241,298 1241,300 ; 1241,302 1241,300 ; 1241,561 1241,566 ; 1241,571 1241,566 ; 1242,238 1240,238 ; 1242,349 1242,351 ; 1242,353 1242,351 ; 1242,454 1242,456 ; 1242,458 1242,456 ; 1243,201 1243,203 ; 1243,205 1243,203 ; 1243,300 1241,300 ; 1244,238 1246,238 ; 1244,351 1242,351 ; 1244,456 1242,456 ; 1245,203 1243,203 ; 1245,300 1247,300 ; 1246,236 1246,238 ; 1246,240 1246,238 ; 1246,351 1248,351 ; 1246,566 1241,566 ; 1247,298 1247,300 ; 1247,302 1247,300 ; 1248,238 1246,238 ; 1248,349 1248,351 ; 1248,353 1248,351 ; 1249,300 1247,300 ; 1250,351 1248,351 ; 1251,300 1253,300 ; 1252,351 1254,351 ; 1252,456 1254,456 ; 1253,203 1255,203 ; 1253,298 1253,300 ; 1253,302 1253,300 ; 1254,349 1254,351 ; 1254,353 1254,351 ; 1254,454 1254,456 ; 1254,458 1254,456 ; 1255,201 1255,203 ; 1255,205 1255,203 ; 1255,300 1253,300 ; 1256,351 1254,351 ; 1256,456 1254,456 ; 1257,203 1255,203 ; 1257,300 1259,300 ; 1258,351 1260,351 ; 1258,456 1260,456 ; 1259,203 1261,203 ; 1259,298 1259,300 ; 1259,302 1259,300 ; 1260,349 1260,351 ; 1260,353 1260,351 ; 1260,454 1260,456 ; 1260,458 1260,456 ; 1261,201 1261,203 ; 1261,205 1261,203 ; 1261,300 1259,300 ; 1262,238 1264,238 ; 1262,351 1260,351 ; 1262,456 1260,456 ; 1263,203 1261,203 ; 1263,300 1265,300 ; 1264,236 1264,238 ; 1264,240 1264,238 ; 1264,351 1266,351 ; 1264,456 1266,456 ; 1265,298 1265,300 ; 1265,302 1265,300 ; 1266,238 1264,238 ; 1266,349 1266,351 ; 1266,353 1266,351 ; 1266,454 1266,456 ; 1266,458 1266,456 ; 1267,300 1265,300 ; 1268,351 1266,351 ; 1268,456 1266,456 ; 1269,300 1271,300 ; 1270,351 1272,351 ; 1270,456 1272,456 ; 1271,203 1273,203 ; 1271,298 1271,300 ; 1271,302 1271,300 ; 1272,349 1272,351 ; 1272,353 1272,351 ; 1272,454 1272,456 ; 1272,458 1272,456 ; 1273,201 1273,203 ; 1273,205 1273,203 ; 1273,300 1271,300 ; 1274,238 1276,238 ; 1274,351 1272,351 ; 1274,456 1272,456 ; 1275,203 1273,203 ; 1275,300 1277,300 ; 1276,236 1276,238 ; 1276,240 1276,238 ; 1276,351 1278,351 ; 1277,298 1277,300 ; 1277,302 1277,300 ; 1278,238 1276,238 ; 1278,349 1278,351 ; 1278,353 1278,351 ; 1279,300 1277,300 ; 1280,351 1278,351 ; 1281,300 1283,300 ; 1282,351 1284,351 ; 1282,456 1284,456 ; 1283,203 1285,203 ; 1283,298 1283,300 ; 1283,302 1283,300 ; 1284,349 1284,351 ; 1284,353 1284,351 ; 1284,454 1284,456 ; 1284,458 1284,456 ; 1285,201 1285,203 ; 1285,205 1285,203 ; 1285,300 1283,300 ; 1286,238 1288,238 ; 1286,351 1284,351 ; 1286,456 1284,456 ; 1287,203 1285,203 ; 1287,300 1289,300 ; 1288,236 1288,238 ; 1288,240 1288,238 ; 1288,351 1290,351 ; 1288,456 1290,456 ; 1289,203 1291,203 ; 1289,298 1289,300 ; 1289,302 1289,300 ; 1290,238 1288,238 ; 1290,349 1290,351 ; 1290,353 1290,351 ; 1290,454 1290,456 ; 1290,458 1290,456 ; 1291,201 1291,203 ; 1291,205 1291,203 ; 1291,300 1289,300 ; 1292,238 1294,238 ; 1292,351 1290,351 ; 1292,456 1290,456 ; 1293,203 1291,203 ; 1293,300 1295,300 ; 1294,236 1294,238 ; 1294,240 1294,238 ; 1294,351 1296,351 ; 1294,456 1296,456 ; 1295,203 1297,203 ; 1295,298 1295,300 ; 1295,302 1295,300 ; 1296,238 1294,238 ; 1296,349 1296,351 ; 1296,353 1296,351 ; 1296,454 1296,456 ; 1296,458 1296,456 ; 1297,201 1297,203 ; 1297,205 1297,203 ; 1297,300 1295,300 ; 1298,351 1296,351 ; 1298,456 1296,456 ; 1299,203 1297,203 ; 1299,300 1301,300 ; 1300,351 1302,351 ; 1300,456 1302,456 ; 1301,203 1303,203 ; 1301,298 1301,300 ; 1301,302 1301,300 ; 1302,349 1302,351 ; 1302,353 1302,351 ; 1302,454 1302,456 ; 1302,458 1302,456 ; 1303,201 1303,203 ; 1303,205 1303,203 ; 1303,300 1301,300 ; 1304,351 1302,351 ; 1304,456 1302,456 ; 1305,203 1303,203 ; 1305,300 1307,300 ; 1306,351 1308,351 ; 1306,456 1308,456 ; 1307,203 1309,203 ; 1307,298 1307,300 ; 1307,302 1307,300 ; 1308,349 1308,351 ; 1308,353 1308,351 ; 1308,454 1308,456 ; 1308,458 1308,456 ; 1309,201 1309,203 ; 1309,205 1309,203 ; 1309,300 1307,300 ; 1310,351 1308,351 ; 1310,456 1308,456 ; 1311,203 1309,203 ; 1311,300 1313,300 ; 1312,351 1314,351 ; 1312,456 1314,456 ; 1313,203 1315,203 ; 1313,298 1313,300 ; 1313,302 1313,300 ; 1314,349 1314,351 ; 1314,353 1314,351 ; 1314,454 1314,456 ; 1314,458 1314,456 ; 1315,201 1315,203 ; 1315,205 1315,203 ; 1315,300 1313,300 ; 1316,238 1318,238 ; 1316,351 1314,351 ; 1316,456 1314,456 ; 1317,203 1315,203 ; 1317,300 1319,300 ; 1318,236 1318,238 ; 1318,240 1318,238 ; 1318,351 1320,351 ; 1318,456 1320,456 ; 1319,298 1319,300 ; 1319,302 1319,300 ; 1320,238 1318,238 ; 1320,349 1320,351 ; 1320,353 1320,351 ; 1320,454 1320,456 ; 1320,458 1320,456 ; 1321,300 1319,300 ; 1322,351 1320,351 ; 1322,456 1320,456 ; 1323,300 1325,300 ; 1324,351 1326,351 ; 1324,456 1326,456 ; 1325,298 1325,300 ; 1325,302 1325,300 ; 1326,349 1326,351 ; 1326,353 1326,351 ; 1326,454 1326,456 ; 1326,458 1326,456 ; 1327,300 1325,300 ; 1328,238 1330,238 ; 1328,351 1326,351 ; 1328,456 1326,456 ; 1329,300 1331,300 ; 1330,236 1330,238 ; 1330,240 1330,238 ; 1330,351 1332,351 ; 1330,456 1332,456 ; 1331,298 1331,300 ; 1331,302 1331,300 ; 1332,238 1330,238 ; 1332,349 1332,351 ; 1332,353 1332,351 ; 1332,454 1332,456 ; 1332,458 1332,456 ; 1333,300 1331,300 ; 1334,238 1336,238 ; 1334,351 1332,351 ; 1334,456 1332,456 ; 1335,300 1337,300 ; 1336,236 1336,238 ; 1336,240 1336,238 ; 1336,351 1338,351 ; 1336,456 1338,456 ; 1337,298 1337,300 ; 1337,302 1337,300 ; 1338,238 1336,238 ; 1338,349 1338,351 ; 1338,353 1338,351 ; 1338,454 1338,456 ; 1338,458 1338,456 ; 1339,300 1337,300 ; 1340,351 1338,351 ; 1340,456 1338,456 ; 1341,300 1343,300 ; 1342,351 1344,351 ; 1342,456 1344,456 ; 1343,298 1343,300 ; 1343,302 1343,300 ; 1344,349 1344,351 ; 1344,353 1344,351 ; 1344,454 1344,456 ; 1344,458 1344,456 ; 1345,300 1343,300 ; 1346,238 1348,238 ; 1346,351 1344,351 ; 1346,456 1344,456 ; 1347,300 1349,300 ; 1348,236 1348,238 ; 1348,240 1348,238 ; 1348,351 1350,351 ; 1348,456 1350,456 ; 1349,298 1349,300 ; 1349,302 1349,300 ; 1350,238 1348,238 ; 1350,349 1350,351 ; 1350,353 1350,351 ; 1350,454 1350,456 ; 1350,458 1350,456 ; 1351,300 1349,300 ; 1352,351 1350,351 ; 1352,456 1350,456 ; 1353,300 1355,300 ; 1354,351 1356,351 ; 1354,456 1356,456 ; 1355,298 1355,300 ; 1355,302 1355,300 ; 1356,349 1356,351 ; 1356,353 1356,351 ; 1356,454 1356,456 ; 1356,458 1356,456 ; 1357,300 1355,300 ; 1358,351 1356,351 ; 1358,456 1356,456 ; 1359,300 1361,300 ; 1360,351 1362,351 ; 1360,456 1362,456 ; 1361,298 1361,300 ; 1361,302 1361,300 ; 1362,349 1362,351 ; 1362,353 1362,351 ; 1362,454 1362,456 ; 1362,458 1362,456 ; 1363,300 1361,300 ; 1364,238 1366,238 ; 1364,351 1362,351 ; 1364,456 1362,456 ; 1365,300 1367,300 ; 1366,236 1366,238 ; 1366,240 1366,238 ; 1366,351 1368,351 ; 1367,298 1367,300 ; 1367,302 1367,300 ; 1368,238 1366,238 ; 1368,349 1368,351 ; 1368,353 1368,351 ; 1369,300 1367,300 ; 1370,238 1372,238 ; 1370,351 1368,351 ; 1371,300 1373,300 ; 1372,236 1372,238 ; 1372,240 1372,238 ; 1372,351 1374,351 ; 1373,298 1373,300 ; 1373,302 1373,300 ; 1374,238 1372,238 ; 1374,349 1374,351 ; 1374,353 1374,351 ; 1375,300 1373,300 ; 1376,351 1374,351 ; 1377,300 1379,300 ; 1378,351 1380,351 ; 1379,298 1379,300 ; 1379,302 1379,300 ; 1380,349 1380,351 ; 1380,353 1380,351 ; 1381,300 1379,300 ; 1382,238 1384,238 ; 1382,351 1380,351 ; 1383,300 1385,300 ; 1384,236 1384,238 ; 1384,240 1384,238 ; 1384,351 1386,351 ; 1384,456 1386,456 ; 1385,298 1385,300 ; 1385,302 1385,300 ; 1386,238 1384,238 ; 1386,349 1386,351 ; 1386,353 1386,351 ; 1386,454 1386,456 ; 1386,458 1386,456 ; 1387,300 1385,300 ; 1388,351 1386,351 ; 1388,456 1386,456 ; 1389,300 1391,300 ; 1390,351 1392,351 ; 1390,456 1392,456 ; 1391,298 1391,300 ; 1391,302 1391,300 ; 1392,349 1392,351 ; 1392,353 1392,351 ; 1392,454 1392,456 ; 1392,458 1392,456 ; 1393,300 1391,300 ; 1394,238 1396,238 ; 1394,351 1392,351 ; 1394,456 1392,456 ; 1395,300 1397,300 ; 1396,236 1396,238 ; 1396,240 1396,238 ; 1396,456 1398,456 ; 1397,298 1397,300 ; 1397,302 1397,300 ; 1398,238 1396,238 ; 1398,454 1398,456 ; 1398,458 1398,456 ; 1399,300 1397,300 ; 1400,456 1398,456 ; 1401,300 1403,300 ; 1402,456 1404,456 ; 1403,298 1403,300 ; 1403,302 1403,300 ; 1404,454 1404,456 ; 1404,458 1404,456 ; 1405,300 1403,300 ; 1406,456 1404,456 ; 1407,300 1409,300 ; 1408,456 1410,456 ; 1409,298 1409,300 ; 1409,302 1409,300 ; 1410,454 1410,456 ; 1410,458 1410,456 ; 1411,300 1409,300 ; 1412,456 1410,456 ; 1413,300 1415,300 ; 1414,456 1416,456 ; 1415,298 1415,300 ; 1415,302 1415,300 ; 1416,454 1416,456 ; 1416,458 1416,456 ; 1417,300 1415,300 ; 1418,456 1416,456 ; 1419,300 1421,300 ; 1420,456 1422,456 ; 1421,298 1421,300 ; 1421,302 1421,300 ; 1422,454 1422,456 ; 1422,458 1422,456 ; 1423,300 1421,300 ; 1424,456 1422,456 ; 1425,300 1427,300 ; 1426,456 1428,456 ; 1427,298 1427,300 ; 1427,302 1427,300 ; 1428,454 1428,456 ; 1428,458 1428,456 ; 1429,300 1427,300 ; 1430,456 1428,456 ; 1431,300 1433,300 ; 1432,456 1434,456 ; 1433,298 1433,300 ; 1433,302 1433,300 ; 1434,454 1434,456 ; 1434,458 1434,456 ; 1435,300 1433,300 ; 1436,456 1434,456 ; 1438,456 1440,456 ; 1440,454 1440,456 ; 1440,458 1440,456 ; 1442,456 1440,456 ; 1444,456 1446,456 ; 1445,385 1447,385 ; 1446,454 1446,456 ; 1446,458 1446,456 ; 1447,383 1447,385 ; 1447,387 1447,385 ; 1448,456 1446,456 ; 1449,385 1447,385 ; 1450,456 1452,456 ; 1451,385 1453,385 ; 1452,454 1452,456 ; 1452,458 1452,456 ; 1453,383 1453,385 ; 1453,387 1453,385 ; 1454,456 1452,456 ; 1455,385 1453,385 ; 1462,456 1464,456 ; 1464,454 1464,456 ; 1464,458 1464,456 ; 1466,456 1464,456 ; 1468,456 1470,456 ; 1469,385 1471,385 ; 1470,454 1470,456 ; 1470,458 1470,456 ; 1471,383 1471,385 ; 1471,387 1471,385 ; 1472,456 1470,456 ; 1473,385 1471,385 ; 1474,456 1476,456 ; 1475,385 1477,385 ; 1476,454 1476,456 ; 1476,458 1476,456 ; 1477,383 1477,385 ; 1477,387 1477,385 ; 1478,456 1476,456 ; 1479,385 1477,385 ; 1480,456 1482,456 ; 1481,385 1483,385 ; 1482,454 1482,456 ; 1482,458 1482,456 ; 1483,383 1483,385 ; 1483,387 1483,385 ; 1484,456 1482,456 ; 1485,385 1483,385 ; 1486,456 1488,456 ; 1487,385 1489,385 ; 1488,454 1488,456 ; 1488,458 1488,456 ; 1489,383 1489,385 ; 1489,387 1489,385 ; 1490,456 1488,456 ; 1491,385 1489,385 ; 1492,456 1494,456 ; 1493,385 1495,385 ; 1494,454 1494,456 ; 1494,458 1494,456 ; 1495,383 1495,385 ; 1495,387 1495,385 ; 1496,456 1494,456 ; 1497,385 1495,385 ; 1498,456 1500,456 ; 1499,385 1501,385 ; 1500,454 1500,456 ; 1500,458 1500,456 ; 1501,383 1501,385 ; 1501,387 1501,385 ; 1502,456 1500,456 ; 1503,385 1501,385 ; 1505,385 1507,385 ; 1507,383 1507,385 ; 1507,387 1507,385 ; 1509,385 1507,385 ; 1511,385 1513,385 ; 1513,383 1513,385 ; 1513,387 1513,385 ; 1515,385 1513,385 ; 1517,385 1519,385 ; 1519,383 1519,385 ; 1519,387 1519,385 ; 1521,385 1519,385 ; 1523,385 1525,385 ; 1525,383 1525,385 ; 1525,387 1525,385 ; 1527,385 1525,385 ; 1529,385 1531,385 ; 1531,383 1531,385 ; 1531,387 1531,385 ; 1533,385 1531,385 ; 1535,385 1537,385 ; 1537,383 1537,385 ; 1537,387 1537,385 ; 1539,385 1537,385 ; 1541,385 1543,385 ; 1543,383 1543,385 ; 1543,387 1543,385 ; 1545,385 1543,385 ; 1547,385 1549,385 ; 1549,383 1549,385 ; 1549,387 1549,385 ; 1551,385 1549,385 ; 1559,385 1561,385 ; 1561,383 1561,385 ; 1561,387 1561,385 ; 1563,385 1561,385 ; 1571,385 1573,385 ; 1573,383 1573,385 ; 1573,387 1573,385 ; 1575,385 1573,385 ; 1577,385 1579,385 ; 1579,383 1579,385 ; 1579,387 1579,385 ; 1581,385 1579,385 ; 1595,385 1597,385 ; 1597,383 1597,385 ; 1597,387 1597,385 ; 1599,385 1597,385 ; 1601,385 1603,385 ; 1603,383 1603,385 ; 1603,387 1603,385 ; 1605,385 1603,385 ; 1625,385 1627,385 ; 1627,383 1627,385 ; 1627,387 1627,385 ; 1629,385 1627,385 ; 1631,385 1633,385 ; 1633,383 1633,385 ; 1633,387 1633,385 ; 1635,385 1633,385 ; 1637,385 1639,385 ; 1639,383 1639,385 ; 1639,387 1639,385 ; 1641,385 1639,385 ; 1643,385 1645,385 ; 1645,383 1645,385 ; 1645,387 1645,385 ; 1647,385 1645,385 ; 1655,385 1657,385 ; 1657,383 1657,385 ; 1657,387 1657,385 ; 1659,385 1657,385 ; 1667,385 1669,385 ; 1669,383 1669,385 ; 1669,387 1669,385 ; 1671,385 1669,385 ; 1679,385 1681,385 ; 1681,383 1681,385 ; 1681,387 1681,385 ; 1683,385 1681,385 ; 1685,385 1687,385 ; 1687,383 1687,385 ; 1687,387 1687,385 ; 1689,385 1687,385 ; 1709,385 1711,385 ; 1711,383 1711,385 ; 1711,387 1711,385 ; 1713,385 1711,385 ; 1721,385 1723,385 ; 1723,383 1723,385 ; 1723,387 1723,385 ; 1725,385 1723,385 ; 1733,385 1735,385 ; 1735,383 1735,385 ; 1735,387 1735,385 ; 1737,385 1735,385 ; 1739,385 1741,385 ; 1741,383 1741,385 ; 1741,387 1741,385 ; 1743,385 1741,385 ; 1763,385 1765,385 ; 1765,383 1765,385 ; 1765,387 1765,385 ; 1767,385 1765,385 ; 1775,385 1777,385 ; 1777,383 1777,385 ; 1777,387 1777,385 ; 1779,385 1777,385 ; 1781,385 1783,385 ; 1783,383 1783,385 ; 1783,387 1783,385 ; 1785,385 1783,385 ; 1793,385 1795,385 ; 1795,383 1795,385 ; 1795,387 1795,385 ; 1797,385 1795,385 ; 1811,385 1813,385 ; 1813,383 1813,385 ; 1813,387 1813,385 ; 1815,385 1813,385 ; 1817,385 1819,385 ; 1819,383 1819,385 ; 1819,387 1819,385 ; 1821,385 1819,385 ; 1829,385 1831,385 ; 1831,383 1831,385 ; 1831,387 1831,385 ; 1833,385 1831,385 ; 120.175,110.236 244.983,122.936 ; 120.175,110.236 244.983,122.936 ; 120.175,110.236 244.983,122.936 ; 120.175,110.236 244.983,122.936 ; 120.175,110.236 244.983,122.936 ; 120.175,110.236 244.983,122.936 ; 130.175,100.236 244.983,122.936 ; 130.175,100.236 244.983,122.936 ; 130.175,100.236 244.983,122.936 ; 130.175,100.236 244.983,122.936 ; 130.175,100.236 244.983,122.936 ; 130.175,100.236 244.983,122.936 ; 130.175,120.236 244.983,122.936 ; 130.175,120.236 244.983,122.936 ; 130.175,120.236 244.983,122.936 ; 130.175,120.236 244.983,122.936 ; 130.175,120.236 244.983,122.936 ; 130.175,120.236 244.983,122.936 ; 140.175,110.236 244.983,122.936 ; 140.175,110.236 244.983,122.936 ; 140.175,110.236 244.983,122.936 ; 140.175,110.236 244.983,122.936 ; 140.175,110.236 244.983,122.936 ; 140.175,110.236 244.983,122.936 ; 736,98 738,98 ; 736,98 738,98 ; 736,98 738,98 ; 736,98 738,98 ; 738,96 738,98 ; 738,96 738,98 ; 738,96 738,98 ; 738,96 738,98 ; 738,98 740,98 ; 738,98 738,100 ; 738,98 740,98 ; 738,98 738,100 ; 738,98 740,98 ; 738,98 738,100 ; 738,98 740,98 ; 738,98 738,100 ; 739,98 ccw(c738,98) 739,98 ; 739,98 ccw(c738,98) 739,98 ; 739,98 ccw(c738,98) 739,98 ; 739,98 ccw(c738,98) 739,98 ; 742,98 744,98 ; 742,98 744,98 ; 742,98 744,98 ; 744,96 744,98 ; 744,96 744,98 ; 744,96 744,98 ; 744,98 746,98 ; 744,98 744,100 ; 744,98 746,98 ; 744,98 744,100 ; 744,98 746,98 ; 744,98 744,100 ; 745,98 ccw(c744,98) 745,98 ; 745,98 ccw(c744,98) 745,98 ; 745,98 ccw(c744,98) 745,98 ; 748,98 750,98 ; 748,98 750,98 ; 748,98 750,98 ; 750,96 750,98 ; 750,96 750,98 ; 750,96 750,98 ; 750,98 752,98 ; 750,98 750,100 ; 750,98 752,98 ; 750,98 750,100 ; 750,98 752,98 ; 750,98 750,100 ; 751,98 ccw(c750,98) 751,98 ; 751,98 ccw(c750,98) 751,98 ; 751,98 ccw(c750,98) 751,98 ; 754,98 756,98 ; 754,98 756,98 ; 754,98 756,98 ; 754,98 756,98 ; 756,96 756,98 ; 756,96 756,98 ; 756,96 756,98 ; 756,96 756,98 ; 756,98 758,98 ; 756,98 756,100 ; 756,98 758,98 ; 756,98 756,100 ; 756,98 758,98 ; 756,98 756,100 ; 756,98 758,98 ; 756,98 756,100 ; 757,98 ccw(c756,98) 757,98 ; 757,98 ccw(c756,98) 757,98 ; 757,98 ccw(c756,98) 757,98 ; 757,98 ccw(c756,98) 757,98 ; 760,98 762,98 ; 760,98 762,98 ; 760,98 762,98 ; 760,98 762,98 ; 762,96 762,98 ; 762,96 762,98 ; 762,96 762,98 ; 762,96 762,98 ; 762,98 764,98 ; 762,98 762,100 ; 762,98 764,98 ; 762,98 762,100 ; 762,98 764,98 ; 762,98 762,100 ; 762,98 764,98 ; 762,98 762,100 ; 763,98 ccw(c762,98) 763,98 ; 763,98 ccw(c762,98) 763,98 ; 763,98 ccw(c762,98) 763,98 ; 763,98 ccw(c762,98) 763,98 ; 766,98 768,98 ; 766,98 768,98 ; 766,98 768,98 ; 768,96 768,98 ; 768,96 768,98 ; 768,96 768,98 ; 768,98 770,98 ; 768,98 768,100 ; 768,98 770,98 ; 768,98 768,100 ; 768,98 770,98 ; 768,98 768,100 ; 769,98 ccw(c768,98) 769,98 ; 769,98 ccw(c768,98) 769,98 ; 769,98 ccw(c768,98) 769,98 ; 772,98 774,98 ; 772,98 774,98 ; 772,98 774,98 ; 774,96 774,98 ; 774,96 774,98 ; 774,96 774,98 ; 774,98 776,98 ; 774,98 774,100 ; 774,98 776,98 ; 774,98 774,100 ; 774,98 776,98 ; 774,98 774,100 ; 775,98 ccw(c774,98) 775,98 ; 775,98 ccw(c774,98) 775,98 ; 775,98 ccw(c774,98) 775,98 ; 778,98 780,98 ; 778,98 780,98 ; 778,98 780,98 ; 778,98 780,98 ; 780,96 780,98 ; 780,96 780,98 ; 780,96 780,98 ; 780,96 780,98 ; 780,98 782,98 ; 780,98 780,100 ; 780,98 782,98 ; 780,98 780,100 ; 780,98 782,98 ; 780,98 780,100 ; 780,98 782,98 ; 780,98 780,100 ; 781,98 ccw(c780,98) 781,98 ; 781,98 ccw(c780,98) 781,98 ; 781,98 ccw(c780,98) 781,98 ; 781,98 ccw(c780,98) 781,98 ; 784,98 786,98 ; 784,98 786,98 ; 784,98 786,98 ; 784,98 786,98 ; 786,96 786,98 ; 786,96 786,98 ; 786,96 786,98 ; 786,96 786,98 ; 786,98 788,98 ; 786,98 786,100 ; 786,98 788,98 ; 786,98 786,100 ; 786,98 788,98 ; 786,98 786,100 ; 786,98 788,98 ; 786,98 786,100 ; 787,98 ccw(c786,98) 787,98 ; 787,98 ccw(c786,98) 787,98 ; 787,98 ccw(c786,98) 787,98 ; 787,98 ccw(c786,98) 787,98 ; 979,188 977,188 979,188 ; 979,188 981,188 979,188 ; 979,188 979,186 979,188 ; 979,188 979,190 979,188 ; 983,188 985,188 ; 983,188 985,188 ; 983,188 985,188 ; 985,186 985,188 ; 985,186 985,188 ; 985,186 985,188 ; 985,188 987,188 ; 985,188 985,190 ; 985,188 987,188 ; 985,188 985,190 ; 985,188 987,188 ; 985,188 985,190 ; 986,188 ccw(c985,188) 986,188 ; 986,188 ccw(c985,188) 986,188 ; 986,188 ccw(c985,188) 986,188 ; 989,188 991,188 ; 989,188 991,188 ; 989,188 991,188 ; 991,186 991,188 ; 991,186 991,188 ; 991,186 991,188 ; 991,188 993,188 ; 991,188 991,190 ; 991,188 993,188 ; 991,188 991,190 ; 991,188 993,188 ; 991,188 991,190 ; 992,188 ccw(c991,188) 992,188 ; 992,188 ccw(c991,188) 992,188 ; 992,188 ccw(c991,188) 992,188 ; 995,188 997,188 ; 995,188 997,188 ; 995,188 997,188 ; 997,186 997,188 ; 997,186 997,188 ; 997,186 997,188 ; 997,188 999,188 ; 997,188 997,190 ; 997,188 999,188 ; 997,188 997,190 ; 997,188 999,188 ; 997,188 997,190 ; 998,188 ccw(c997,188) 998,188 ; 998,188 ccw(c997,188) 998,188 ; 998,188 ccw(c997,188) 998,188 ; 1001,188 1003,188 ; 1001,188 1003,188 ; 1001,188 1003,188 ; 1003,186 1003,188 ; 1003,186 1003,188 ; 1003,186 1003,188 ; 1003,188 1005,188 ; 1003,188 1003,190 ; 1003,188 1005,188 ; 1003,188 1003,190 ; 1003,188 1005,188 ; 1003,188 1003,190 ; 1004,188 ccw(c1003,188) 1004,188 ; 1004,188 ccw(c1003,188) 1004,188 ; 1004,188 ccw(c1003,188) 1004,188 ; 1007,188 1009,188 ; 1007,188 1009,188 ; 1007,188 1009,188 ; 1009,186 1009,188 ; 1009,186 1009,188 ; 1009,186 1009,188 ; 1009,188 1011,188 ; 1009,188 1009,190 ; 1009,188 1011,188 ; 1009,188 1009,190 ; 1009,188 1011,188 ; 1009,188 1009,190 ; 1010,188 ccw(c1009,188) 1010,188